# Altium PCB ver1.PcbDoc
Units mil, origin at the board's own origin, x right, y up, seen from the top; angles counter-clockwise.
Board outline 4020 x 3440 mil, 2 copper layers (Top Layer, Bottom Layer); 25 components, 32 nets, 122 pads, 2 vias.
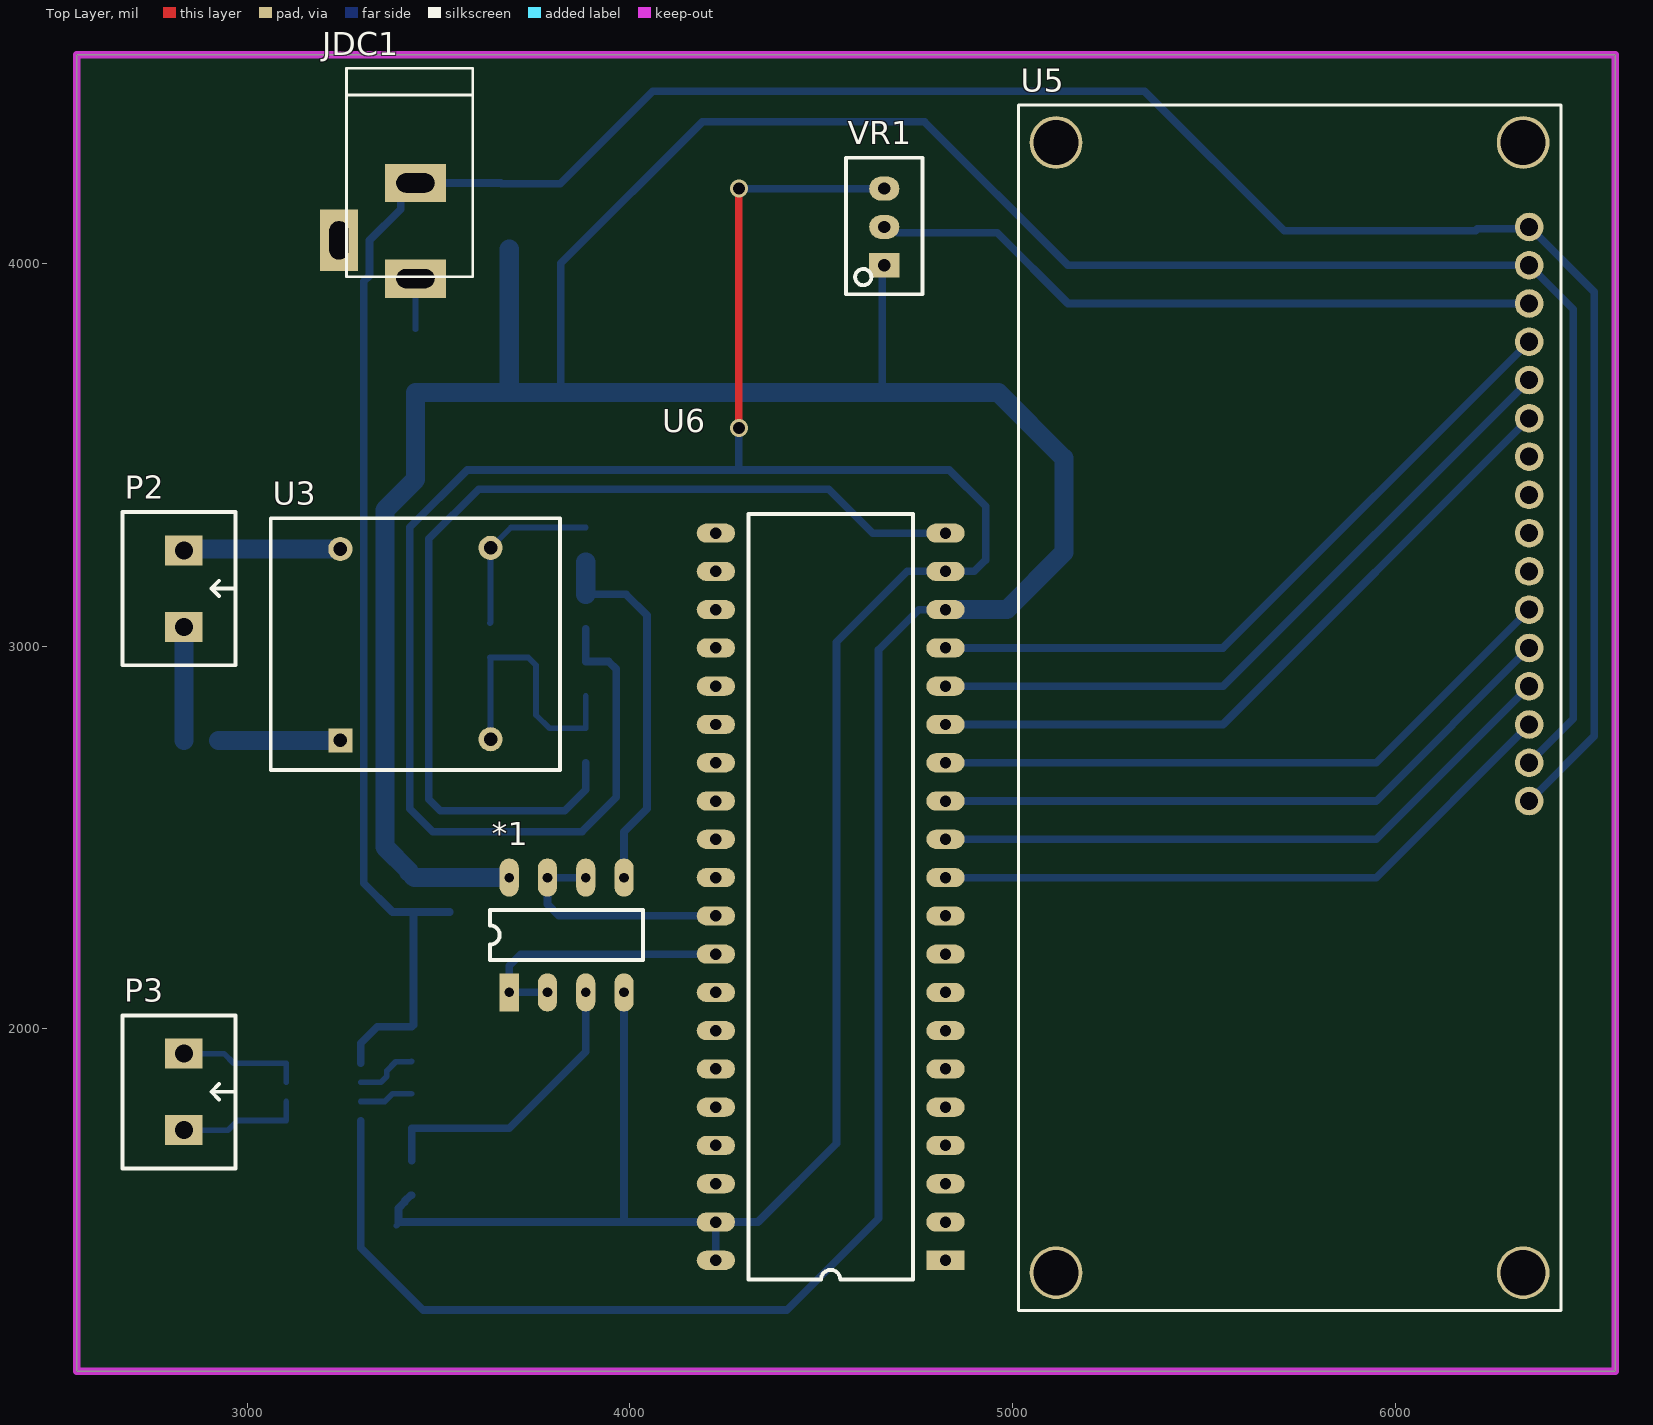
[diagram p0: Top Layer view]
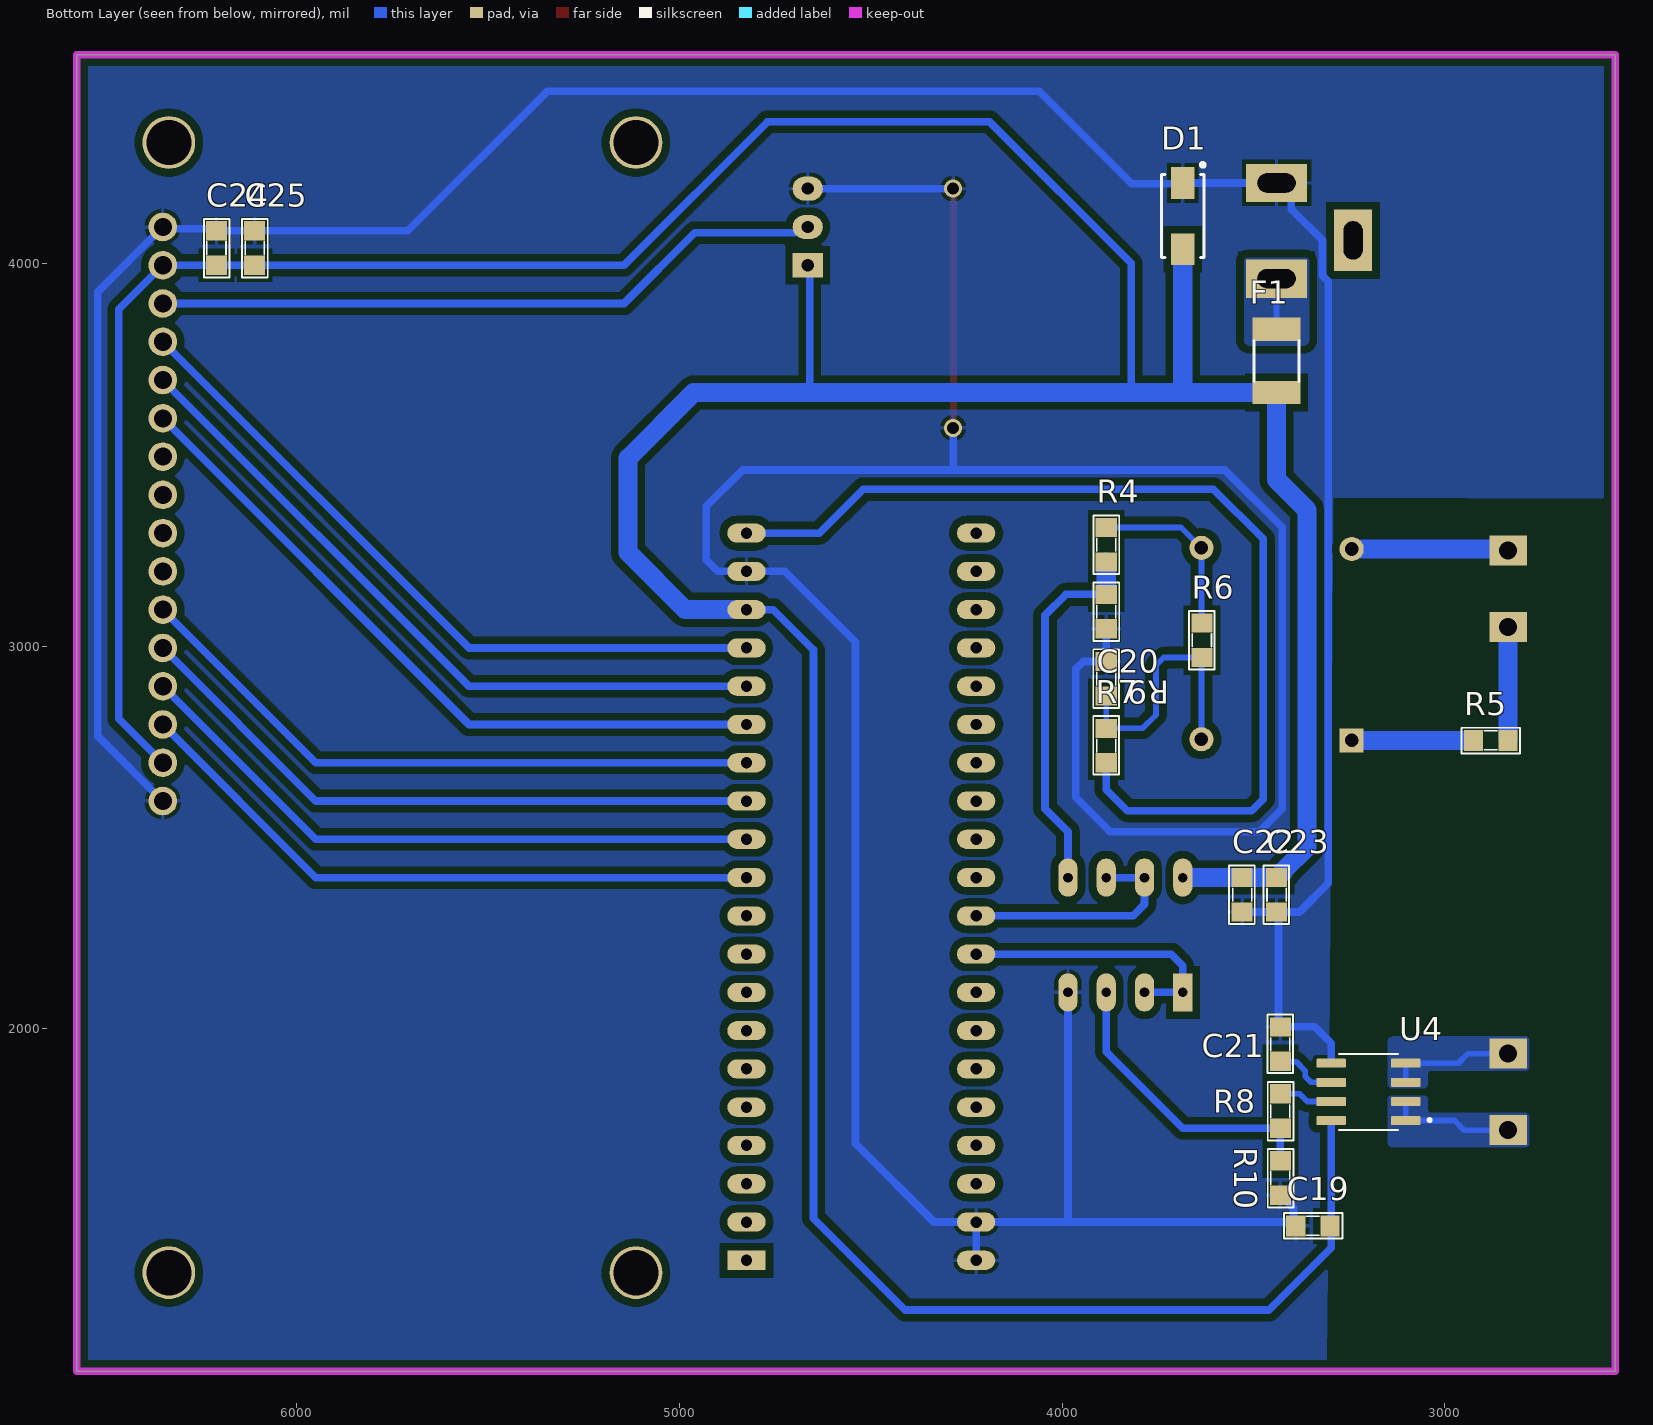
[diagram p1: Bottom Layer view, seen from below]
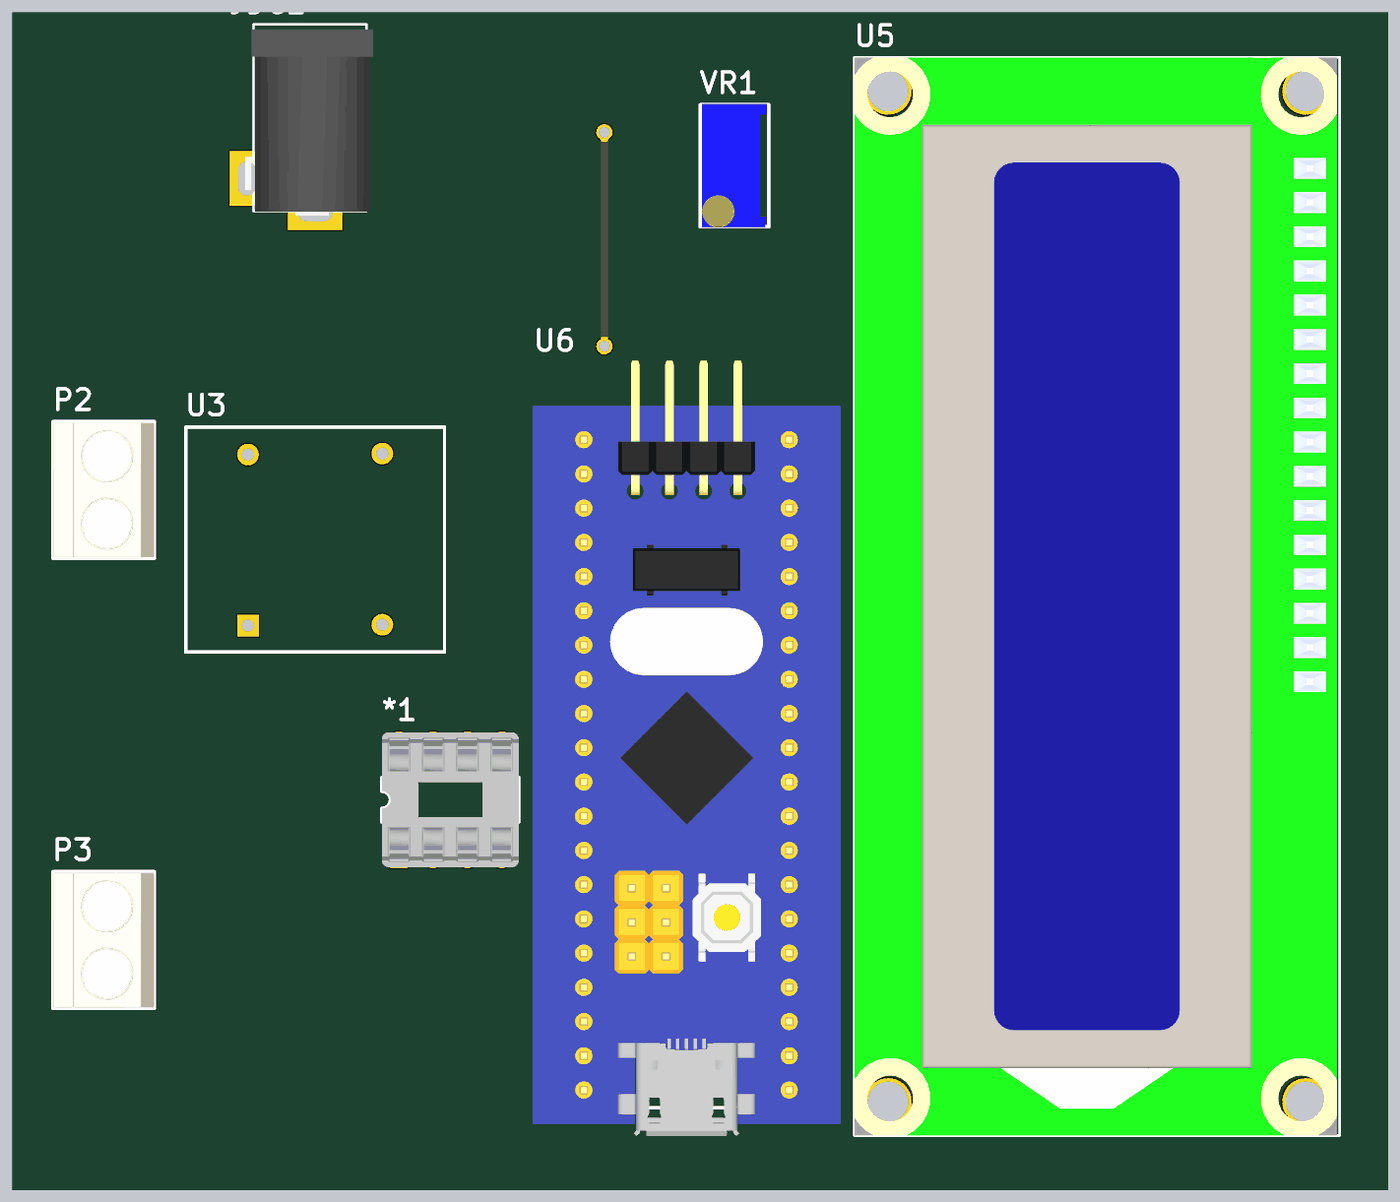
[diagram p2: 3D render of the assembled board from above, using the file's embedded part models]
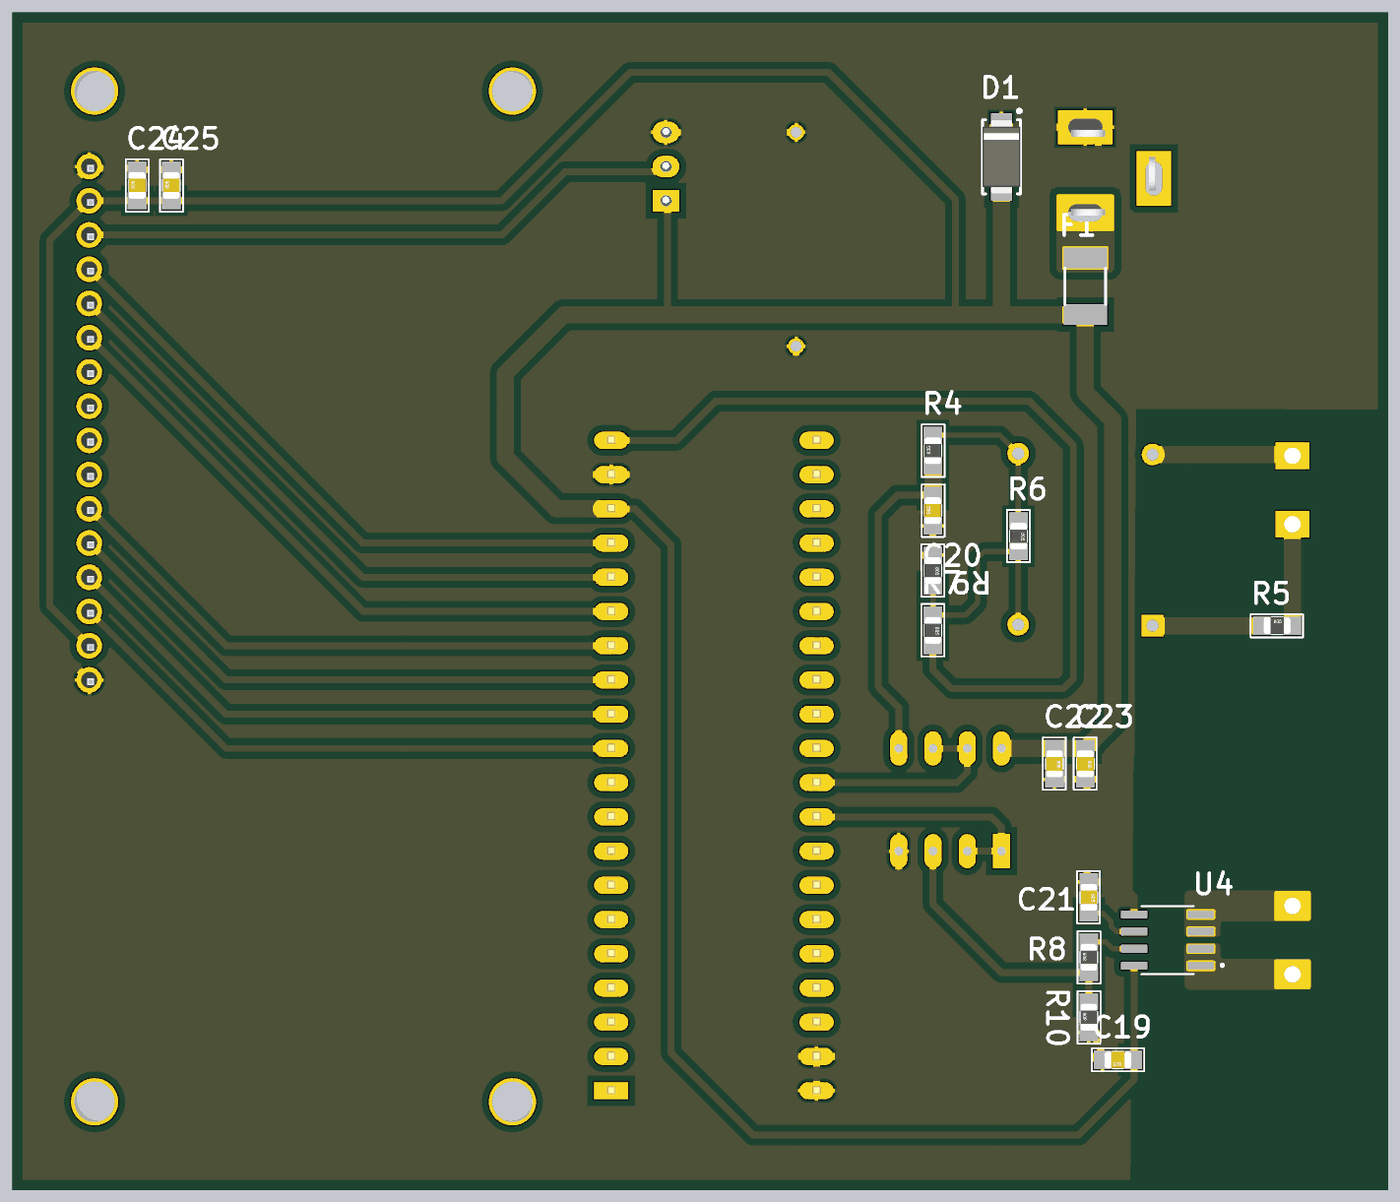
[diagram p3: 3D render of the assembled board from below, using the file's embedded part models]

## Layer stack, top to bottom
Top Solder: solder mask 0.4, Solder Resist, Dk 3.5
Top Layer: signal copper 1.4
Dielectric 1: dielectric 12.6, FR-4, Dk 4.8
Bottom Layer: signal copper 1.4
Bottom Solder: solder mask 0.4, Solder Resist, Dk 3.5

## Board outline
2555,1105 6575,1105 6575,4545 2555,4545

## Design rules (kind name [scope] priority, off if disabled: settings)
Clearance [All] p1: gap=20 ignorepadtopadclearanceinfootprint=FALSE
PolygonConnect PolygonConnect_4 [All vs IsNamedPolygon('NETP3_2_L02_P003')] p1: thpad.connectstyle=Direct thpad.reliefconductorwidth=10 thpad.reliefentries=4 thpad.polygonreliefangle="90 Angle" thpad.airgapwidth=10 smdpad.connectstyle=Direct smdpad.reliefconductorwidth=10 smdpad.reliefentries=4 smdpad.polygonreliefangle="90 Angle" smdpad.airgapwidth=10 via.connectstyle=Relief via.reliefconductorwidth=10 via.reliefentries=4 via.polygonreliefangle="90 Angle" via.airgapwidth=10
PolygonConnect PolygonConnect_3 [All vs IsNamedPolygon('NETP3_2_L02_P002')] p2: thpad.connectstyle=Direct thpad.reliefconductorwidth=10 thpad.reliefentries=4 thpad.polygonreliefangle="90 Angle" thpad.airgapwidth=10 smdpad.connectstyle=Direct smdpad.reliefconductorwidth=10 smdpad.reliefentries=4 smdpad.polygonreliefangle="90 Angle" smdpad.airgapwidth=10 via.connectstyle=Relief via.reliefconductorwidth=10 via.reliefentries=4 via.polygonreliefangle="90 Angle" via.airgapwidth=10
PolygonConnect PolygonConnect_2 [All vs IsNamedPolygon('NETP3_1_L02_P001')] p3: thpad.connectstyle=Direct thpad.reliefconductorwidth=10 thpad.reliefentries=4 thpad.polygonreliefangle="90 Angle" thpad.airgapwidth=10 smdpad.connectstyle=Direct smdpad.reliefconductorwidth=10 smdpad.reliefentries=4 smdpad.polygonreliefangle="90 Angle" smdpad.airgapwidth=10 via.connectstyle=Relief via.reliefconductorwidth=10 via.reliefentries=4 via.polygonreliefangle="90 Angle" via.airgapwidth=10
PolygonConnect PolygonConnect_1 [All vs IsNamedPolygon('NETF1_1_L02_P000')] p4: thpad.connectstyle=Direct thpad.reliefconductorwidth=10 thpad.reliefentries=4 thpad.polygonreliefangle="90 Angle" thpad.airgapwidth=10 smdpad.connectstyle=Direct smdpad.reliefconductorwidth=10 smdpad.reliefentries=4 smdpad.polygonreliefangle="90 Angle" smdpad.airgapwidth=10 via.connectstyle=Relief via.reliefconductorwidth=10 via.reliefentries=4 via.polygonreliefangle="90 Angle" via.airgapwidth=10
PolygonConnect [All] p5: connectstyle=Relief reliefconductorwidth=10 reliefentries=4 polygonreliefangle="90 Angle" airgapwidth=10
RoutingVias [All] p1: holewidth=31.5 width=47.24 viastyle="Through Hole" minholewidth=31.5 minwidth=47.24 maxholewidth=31.5 maxwidth=47.24
SolderMaskExpansion [All] p1: expansion=4 istentingtop=FALSE
Width [All] p1: maxlimit=50 minlimit=15 preferedwidth=20
30 further rules are at their usual default settings.

## Classes and differential pairs
component class Bluepill: U6
component class Power_Supply: D1 F1 JDC1
component class Measure: *1 C19 C20 C21 C22 C23 P2 P3 R4 R5 R6 R7 R8 R9 R10 U3 U4
component class Display: C24 C25 U5 VR1

## Components (designator, comment, footprint, x,y, rotation, side; value= is the part's Value field where it differs from the comment)
*1 "LM358" DIP8 3685,2095 r90 top
C19 "Cap Non-Pol SMD" CAP-SM-0805 3300,1485 r0 bottom value=100nF/50V/0805
C20 "Cap Non-Pol SMD" CAP-SM-0805 3885,3045 r90 bottom value=100nF/50V/0805
C21 "Cap Non-Pol SMD" CAP-SM-0805 3430,2005 r270 bottom value=1nF/50V/0805
C22 "Cap Non-Pol SMD" CAP-SM-0805 3530,2395 r270 bottom value=100nF/50V/0805
C23 "Cap Non-Pol SMD" CAP-SM-0805 3440,2395 r270 bottom value=4.7uF/50V/0805
C24 "Cap Non-Pol SMD" CAP-SM-0805 6210,3995 r90 bottom value=4.7uF/50V/0805
C25 "Cap Non-Pol SMD" CAP-SM-0805 6110,3995 r90 bottom value=100nF/50V/0805
D1 "D Schottky" SS34 3685,4123.39 r270 bottom
F1 "Fuse" "FUSE SMD" 3440,3745 r270 bottom
JDC1 "Jack DC" DC-IN 3340,4085 r270 top value="Jac DC"
P2 "Domino 2" "DOMINO 2- 5mm" 2835,3150 r270 top
P3 "Domino 2" "DOMINO 2- 5mm" 2835,1835 r270 top
R4 "RESISTOR SMD" RES-SM-0805 3885,3220 r90 bottom value=10K/1%/0805
R5 "RESISTOR SMD" RES-SM-0805 2925,2753.56 r180 bottom value=160K/5%/0805
R6 "RESISTOR SMD" RES-SM-0805 3635,3060 r270 bottom value=560/1%/0805
R7 "RESISTOR SMD" RES-SM-0805 3885,2785 r270 bottom value=10K/1%/0805
R8 "RESISTOR SMD" RES-SM-0805 3430,1740 r90 bottom value=10K/1%/0805
R9 "RESISTOR SMD" RES-SM-0805 3885,2959.5 r270 bottom value=10K/1%/0805
R10 "RESISTOR SMD" RES-SM-0805 3430,1565 r90 bottom value=18K/5%/0805
U3 "ZMPT101B" ZMPT101B 3440,3005 r180 top
U4 "ACS712-20" SOIC127P600X175-8N 3200,1835 r0 bottom
U5 "MODULE LCD" "MODULE LCD 1602" 5731.89,2839.09 r90 top
U6 "BLUEPILL" BLUEPILL 4505,2350 r180 top
VR1 "10K" "VARISTOR 2" 4665,4095 r90 top value="VR 10K"

## Footprints (in the part's own frame and the unit in brackets; to place one, negate y for a bottom-side part, rotate by r counter-clockwise, add the part's x,y. Pads: shape width x height; smd on the part's side, far side on the other; paste and mask are expansions set on the pad)
BLUEPILL [mil] "Development board STM32F103C8T6"
  rect 100x50 hole 30: 1(-320,955)
  oval 100x50 hole 30: 2(-320,855) 3(-320,755) 4(-320,655) 5(-320,555) 6(-320,455) 7(-320,355) 8(-320,255) 9(-320,155) 10(-320,55) 11(-320,-45) 12(-320,-145) 13(-320,-245) 14(-320,-345) 15(-320,-445) 16(-320,-545) 17(-320,-645) 18(-320,-745) 19(-320,-845) 20(-320,-945) 21(280,-945) 22(280,-845) 23(280,-745) 24(280,-645) 25(280,-545) 26(280,-445) 27(280,-345) 28(280,-245) 29(280,-145) 30(280,-45) 31(280,55) 32(280,155) 33(280,255) 34(280,355) 35(280,455) 36(280,555) 37(280,655) 38(280,755) 39(280,855) 40(280,955)
  silkscreen extent -235,-995 195,1005, body extent -470,-1178 430,1088, height 485
CAP-SM-0805 [mil]
  rect 50x55 smd: 1(0,0) 2(90,0)
  silkscreen extent -32,-34 121,33, body extent 6,-25 84,25, height 31
DC-IN [mil] "Jac DC input"
  rect 100x160 hole 50 slot 100 at 90 deg: 1(125,100) 2(-125,100)
  rect 160x100 hole 50 slot 100 at 0 deg: 3(25,-100)
  silkscreen extent -425,-80 120,250, body extent -410,-105 134,269, height 434
DIP8 [mil]
  rect 100x50 hole 25: 1(0,0)
  oval 100x50 hole 25: 2(0,-100) 3(0,-200) 4(0,-300) 5(300,-300) 6(300,-200) 7(300,-100) 8(300,0)
  silkscreen extent 85,-350 215,50, body extent -47,-350 347,50, height 200
"DOMINO 2- 5mm" [mm]
  rect 2x2.5 hole 1.2: 1(-2.54,0) 2(2.54,0)
  silkscreen extent -5.08,-4.08 5.08,3.43, body extent -5,-4.07 5,3.43, height 10
"FUSE SMD" [mm] "SMD FUSE"
  rect 1.55x3.21 smd: 1(-2.1,0) 2(2.1,0)
  silkscreen extent -1.35,-1.5 1.35,1.51, body extent -2.37,-1.71 2.36,1.71, height 0.75
"MODULE LCD 1602" [mm]
  round 1.9 hole 1.2: 1(31.9,-15.7) 2(29.36,-15.7) 3(26.82,-15.7) 4(24.28,-15.7) 5(21.74,-15.7) 6(19.2,-15.7) 7(16.66,-15.7) 8(14.12,-15.7) 9(11.58,-15.7) 10(9.04,-15.7) 11(6.5,-15.7) 12(3.96,-15.7) 13(1.42,-15.7) 14(-1.12,-15.7) 15(-3.66,-15.7) 16(-6.2,-15.7)
  round 3.5 hole 3: ""(-37.5,15.7) ""(-37.5,-15.3) ""(37.5,15.7) ""(37.5,-15.3)
  silkscreen extent -40,-17.8 40,18.2, body extent -40,-17.6 40,18.2, height 16.4
RES-SM-0805 [mil]
  rect 50x55 smd: 1(0,0) 2(90,0)
  silkscreen extent -32,-34 121,33, body extent 6,-25 84,25, height 31
SOIC127P600X175-8N [mm]
  rrect25% 1.97x0.6 smd: 1(-2.475,1.905) 2(-2.475,0.635) 3(-2.475,-0.635) 4(-2.475,-1.905) 5(2.475,-1.905) 6(2.475,-0.635) 7(2.475,0.635) 8(2.475,1.905)
  silkscreen extent -4.16,-2.52 1.95,2.52
SS34 [mm] "DO-214-AC/SMA Molded Diode, Body 5.3x2.6mm, IPC Medium Density"
  rect 2.1x1.55 smd: A(-2.2,0) K(2.2,0)
  silkscreen extent -3.52,-1.4 2.75,1.45, body extent -2.75,-1.4 2.75,1.4, height 2.3
"VARISTOR 2" [mm] "Resistor Variable"
  rect 1.6x2 hole 0.8: 1(-2.54,0)
  oval 1.6x2 hole 0.8: 2(0,0) 3(2.54,0)
  silkscreen extent -4.47,-2.54 4.6,2.54, body extent -4.54,-2.4 4.66,2.4, height 12.02
ZMPT101B [mm]
  rect 1.6x1.6 hole 0.9: 1(4.985,6.387)
  round 1.6 hole 0.9: 2(4.985,-6.313) 3(-4.985,-6.387) 4(-4.985,6.313)
  silkscreen extent -9.6,-8.35 9.6,8.35

## Part data
C19 C20 C21 C22 C23 C24 C25: "Capacitor"
D1: "Schottky Diode", Supplier Part Number 1=SS34, Code_JEDEC=DO-214-AA, LatestRevisionDate=17-Jul-2002, LatestRevisionNote="Re-released for DXP Platform.", PackageDescription="DO-214-AA/SMB; 2 C-Bend Leads; Body 5.3 x 3.6 mm, inc. leads (LxW)", PackageReference=SMB, Published=8-Jun-2000, Publisher="Altium Limited", Supplier 1="Arrow Electronics", Supplier 2=RSComponents, Supplier Part Number 2=8080433
JDC1: "Jack DC input"
P2 P3: "Domino, 2-Pin", LatestRevisionDate=17-Jul-2002, LatestRevisionNote="Re-released for DXP Platform.", Publisher="Altium Limited"
R4 R5 R6 R7 R8 R9 R10: "Resistor"
U3: "Minuscule 2mA/2mA Precision Voltage Transformer"
U4: "ACS712: IC de sensor de corriente lineal basado en efecto Hall totalmente integrado con aislamiento de voltaje de 2,1 kV RMS y un conductor de corriente de baja resistencia", Package=None, Availability="In Stock", Check_prices=https://www.snapeda.com/parts/ACS712-20/Analog+Devices/view-part/?ref=eda, MF="Analog Devices", MP=ACS712-20, Price=None, SnapEDA_Link=https://www.snapeda.com/parts/ACS712-20/Analog+Devices/view-part/?ref=snap
U6: "Development board STM32F103C8T6"
VR1: library part "Var Resistor", "Var Resistor"

## Via types
v1: diameter 47.24, hole 31.5, Top Layer to Bottom Layer, 2 vias

## Nets (pads, with @x,y where several pads share a name; then routed paths per layer and width w, separated by ;. In a path a pad name is that pad's centre, name@x,y a point inside that pad or via, vN(x,y) a via of type N, cw(c..) or ccw(c..) an arc to the next point about the centre after c; other vN are vias at no path point)
+3.3: R7.2 U6.20 | length 2646.7
  Bottom Layer w20: R7.2 3885,2625 3830,2570 3505,2570 3475,2600 3475,3280 3605,3410 4520,3410 4635,3295 U6.20
+5: *1.8 C19.1 C22.1 C23.1 C24.1 C25.1 D1.K F1.2 U4.8 U5.2 U5.15 U6.18 VR1.1 | length 12805.8
  Bottom Layer w20: U4.8 3297.44,1427.56 3460,1265 4410,1265 4650,1505 4650,2990 4755,3095 U6.18 ; 3820,3662.32 3820,4000 4190,4370 4770,4370 5145,3995 C25.1 C24.1 U5.2 6465,3880 6465,2810 U5.15 ; 3980,3662.32 3985,3667.32 ; 4660,3662.32 4660,3990 VR1.1
  Bottom Layer w50: *1.8 C22.1 C23.1 3437.5,2395 3422.5,2410 3422.5,2412.5 3360.23,2474.77 3360.23,3355.23 3440,3435 F1.2 3685,3662.32 ; D1.K 3685,3662.32 ; U6.18 4985,3095 5134.29,3244.29 5134.29,3490.71 4962.68,3662.32 4660,3662.32 3980,3662.32 3820,3662.32 3685,3662.32
ADC_CURRENT: *1.1 *1.2 U6.32 | length 722.4
  Bottom Layer w20: *1.2 *1.1 3685,2165 3715,2195 U6.32
ADC_VOLTAGE: *1.6 *1.7 U6.31 | length 622.4
  Bottom Layer w20: *1.6 *1.7 3785,2325 3815,2295 U6.31
CONTRAST: U5.3 VR1.2 | length 1767.8
  Bottom Layer w20: VR1.2 4684.51,4095 4699.43,4080.08 4959.92,4080.08 5145,3895 U5.3
CURRENT_SIGNAL: *1.3 R8.1 R10.2 | length 777.8
  Bottom Layer w20: R10.2 R8.1 3685,1740 3885,1940 *1.3
GND: *1.4 C19.2 C20.1 C21.1 C22.2 C23.2 C24.2 C25.2 D1.A JDC1.2 R9.1 R10.1 U4.5 U5.1 U5.16 U6.19 U6.39 U6.40 VR1.3 | length 15992.2
  Top Layer w20: v1(4285,3570) v1(4285,4195)
  Bottom Layer w15: C19.2 C19.2@3397.5,1492.5 ; 4537.5,2247.5 4540,2250
  Bottom Layer w20: U4.5 3297.44,1962.44 3340,2005 C21.1 3435,2010 3435,2300 C23.2 ; R10.1 3427.5,1565 3412.5,1550 3412.5,1547.5 3395.78,1530.78 3395.78,1495.78 3395,1495 3985,1495 ; C22.2 C23.2 ; C20.1 R9.1 3945.5,2959.5 3965,2940 3965,2605 3875,2515 3485,2515 3425,2575 3425,3310 3575,3460 4285,3460 ; *1.4 3985,1495 ; U6.39@4220,1495 3985,1495 ; U6.40 U6.39 4335,1495 4540,1700 4540,2250 4540,3010 4725,3195 U6.19 4900,3195 4930,3225 4930,3365 4835,3460 4285,3460 ; v1(4285,3570) 4285,3460 ; v1(4285,4195) VR1.3 ; U5.16 6520,2765 6520,3925 U5.1 6345,4090 6215,4090 C24.2 C25.2 5710,4085 5345,4450 4060,4450 3818.28,4208.28 3665,4208.28 3663.28,4210 3413.79,4210 3401.72,4197.93 3401.72,4141.72 3320,4060 3320,3967.57 3305.23,3952.81 3305.23,2379.77 3380,2305 C23.2
LCD_D4: U5.11 U6.14 | length 1690.7
  Bottom Layer w20: U6.14 5950,2695 U5.11
LCD_D5: U5.12 U6.13 | length 1690.7
  Bottom Layer w20: U6.13 5950,2595 U5.12
LCD_D6: U5.13 U6.12 | length 1690.7
  Bottom Layer w20: U6.12 5950,2495 U5.13
LCD_D7: U5.14 U6.11 | length 1690.7
  Bottom Layer w20: U6.11 5950,2395 U5.14
LCD_EN: U5.6 U6.15 | length 1856.4
  Bottom Layer w20: U6.15 5550,2795 U5.6
LCD_RS: U5.4 U6.17 | length 1856.4
  Bottom Layer w20: U6.17 5550,2995 U5.4
LCD_RW: U5.5 U6.16 | length 1856.4
  Bottom Layer w20: U6.16 5550,2895 U5.5
NetC21_2: C21.2 U4.6 | length 164.1
  Bottom Layer w15: U4.6 3350,1860 3365,1875 3365,1890 3388.79,1913.79 3428.79,1913.79 C21.2
NetD2_2: 
NetD3_2: 
NetF1_1: F1.1 JDC1.1 | length 132.3
  Bottom Layer w15: F1.1 JDC1.1
NetP2_1: P2.1 U3.2 | length 410.2
  Bottom Layer w50: P2.1 2838.56,3253.56 U3.2
NetP2_2: P2.2 R5.2 | length 296.4
  Bottom Layer w50: R5.2 P2.2
NetP3_1: P3.1 U4.3 U4.4 | length 362.9
  Bottom Layer w15: P3.1@2800,1935 2940,1935 2965,1910 U4.4 U4.3
NetP3_2: P3.2 U4.1 U4.2 | length 362.9
  Bottom Layer w15: P3.2@2800,1735 2950,1735 2975,1760 U4.1 U4.2
NetR4_2: R4.2 R6.1 U3.3 | length 467.9
  Bottom Layer w15: R6.1 3636.26,3061.26 U3.3 3689.82,3310 R4.2
NetR5_1: R5.1 U3.1 | length 318.7
  Bottom Layer w50: R5.1 U3.1
NetR6_2: R6.2 R7.1 R9.2 U3.4 | length 701.4
  Bottom Layer w15: U3.4 3636.26,2968.74 R6.2 3735,2970 3755,2950 3755,2820 3790,2785 R7.1 R9.2
NetR8_2: R8.2 U4.7 | length 140.8
  Bottom Layer w15: U4.7 3360,1810 3380,1830 R8.2
NRST: 
OSC_IN: 
OSC_OUT: 
SWCLK: 
SWDIO: 
VOLTAGE_SIGNAL: *1.5 C20.2 R4.1 | length 977.6
  Bottom Layer w20: C20.2 3990,3135 4045,3080 4045,2575 3985,2515 *1.5
  Bottom Layer w50: C20.2 R4.1
pads on no net: JDC1.3 U5. U5.7 U5.8 U5.9 U5.10 U6.1 U6.2 U6.3 U6.4 U6.5 U6.6 U6.7 U6.8 U6.9 U6.10 U6.21 U6.22 U6.23 U6.24 U6.25 U6.26 U6.27 U6.28 U6.29 U6.30 U6.33 U6.34 U6.35 U6.36 U6.37 U6.38

## Polygon pours and split planes (outlines as drawn)
NetF1_1 on Bottom Layer "NETF1_1_L02_P000" (solid, remove dead copper, pour order 0): 3525,4005 ccw(c3515,4005) 3515,4015 3365,4015 ccw(c3365,4005) 3355,4005 3355,3800 ccw(c3370,3800) 3370,3785 3510,3785 ccw(c3510,3800) 3525,3800
GND on Bottom Layer "GND_L02_P004" (solid, remove dead copper, pour order 4): 2555,1105 6575,1105 6575,4545 2555,4545
NetP3_2 on Bottom Layer "NETP3_2_L02_P003" (solid, remove dead copper, pour order 3): 2780,1770 cw(c2790,1770) 2790,1780 3035,1780 ccw(c3035,1790) 3045,1790 3045,1815 cw(c3055,1815) 3055,1825 3140,1825 cw(c3140,1815) 3150,1815 3150,1705 cw(c3135,1705) 3135,1690 2790,1690 cw(c2790,1700) 2780,1700
NetP3_1 on Bottom Layer "NETP3_1_L02_P001" (solid, remove dead copper, pour order 1): 2780,1900 ccw(c2790,1900) 2790,1890 3035,1890 cw(c3035,1880) 3045,1880 3045,1855 ccw(c3055,1855) 3055,1845 3140,1845 ccw(c3140,1855) 3150,1855 3150,1965 ccw(c3135,1965) 3135,1980 2790,1980 ccw(c2790,1970) 2780,1970

## Keep-outs
Keep-Out Layer:
  lines w20: 2555,1105 6575,1105 6575,4545 6385,4545 2555,4545 2555,1105

## Other copper
Bottom Layer:
  pour cut-out: 2585,3385 3291.6,3387.21 3308.46,1135.01 2585.26,1135.26